# Altium PCB MoveH Messkette einseitig.PcbDoc
Units mm, origin at the board's own origin, x right, y up, seen from the top; angles counter-clockwise.
Board outline 66 x 63 mm, 2 copper layers (Top Layer, Bottom Layer); 59 components, 46 nets, 263 pads, 90 vias.
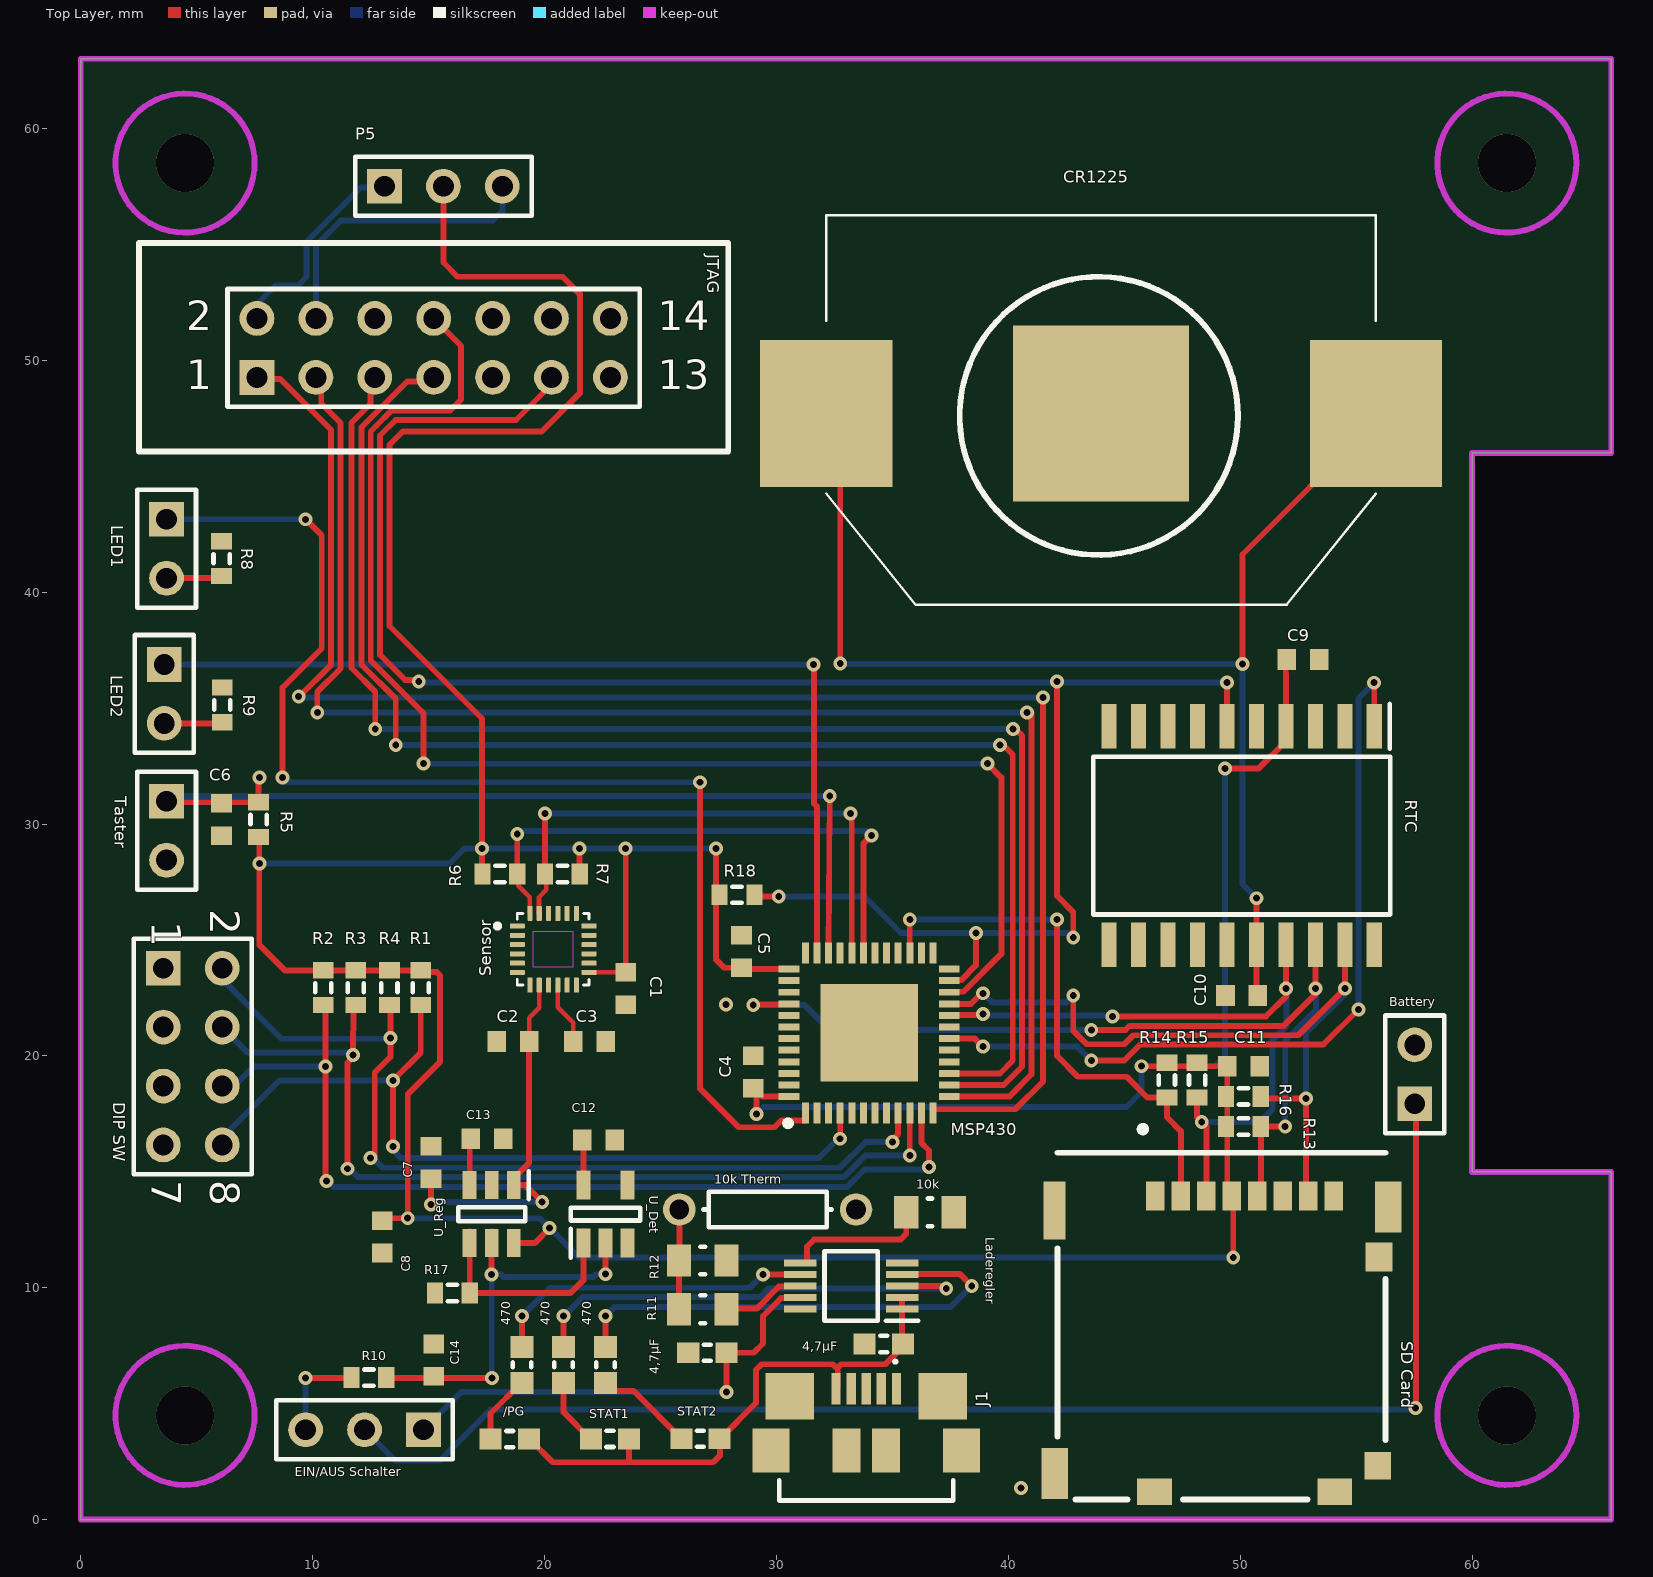
[diagram p0: Top Layer view]
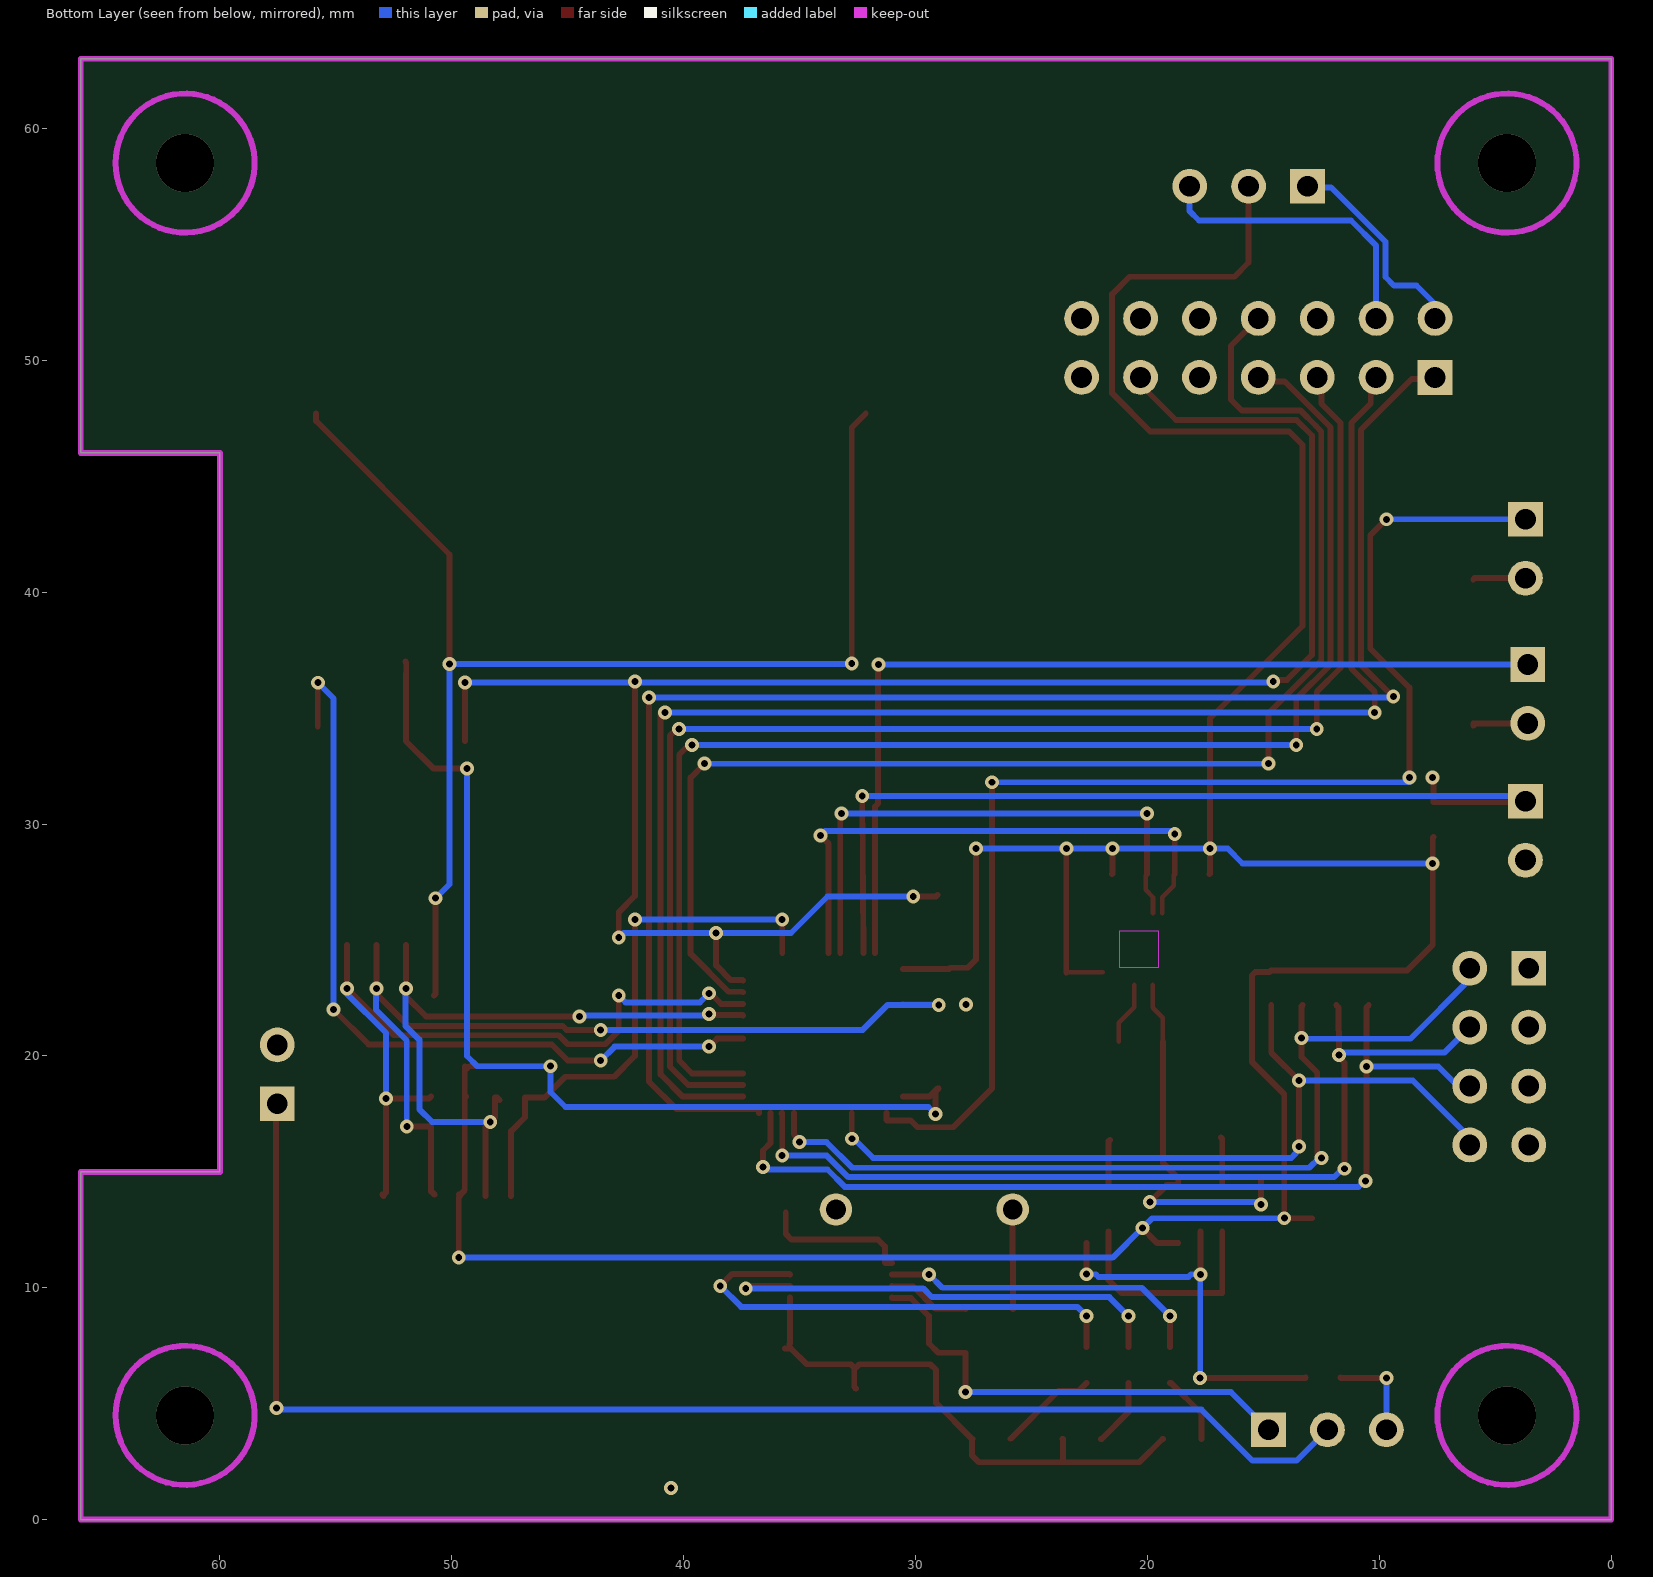
[diagram p1: Bottom Layer view, seen from below]

## Layer stack, top to bottom
Top Solder: solder mask 0.0102, Solder Resist, Dk 3.5
Top Layer: signal copper 0.0356
Dielectric 1: dielectric 0.32, FR-4, Dk 4.8
Bottom Layer: signal copper 0.0356
Bottom Solder: solder mask 0.0102, Solder Resist, Dk 3.5

## Board outline
60,15 66,15 66,0 0,0 0,63 66,63 66,46 60,46

## Design rules (kind name [scope] priority, off if disabled: settings)
Clearance [All] p1: gap=0.15 ignorepadtopadclearanceinfootprint=TRUE
PolygonConnect [All] p1: connectstyle=Relief reliefconductorwidth=0.254 reliefentries=4 polygonreliefangle="90 Angle" airgapwidth=0.254
RoutingVias [All] p1: holewidth=0.3 width=0.6 viastyle="Through Hole" minholewidth=0.3 minwidth=0.6 maxholewidth=0.3 maxwidth=0.6
SilkToSilkClearance [All] p1: silktosilkclearance=0.1
SolderMaskExpansion [All] p1: expansion=0.102
Width [All] p1: maxlimit=0.254 minlimit=0.2 preferedwidth=0.254
29 further rules are at their usual default settings.

## Classes and differential pairs
component class "POWER MANAGEMENT": 4,7µF 10k "10k Therm" 470 /PG Battery C7 C8 C12 C13 C14 "EIN/AUS Schalter" J1 Laderegler R10 R11 R12 R17 STAT1 STAT2 U_Det U_Reg

## Components (designator, comment, footprint, x,y, rotation, side; value= is the part's Value field where it differs from the comment)
4,7µF "VJ0603" VJ0603 27.023,7.197 r180 top
4,7µF "VJ0603" VJ0603 34.623,7.577 r180 top
10k "RES 0805" D12CRCW0805 36.623,13.252 r180 top
"10k Therm" "10k Therm" AXIAL-0.3 29.623,13.377 r180 top value=1K
470 "RES 0603" "Vishay D11/CRCW0603 Resistor" 19.023,6.677 r90 top
470 "RES 0603" "Vishay D11/CRCW0603 Resistor" 22.623,6.677 r90 top
470 "RES 0603" "Vishay D11/CRCW0603 Resistor" 20.823,6.677 r90 top
/PG "LED SMD 0603" "SMD LED 0603" 18.498,3.477 r180 top
Battery "Header 2H" HDR1X2 57.525,17.935 r90 top
C1 "Cap" 1608[0603] 23.5,22.9 r90 top value=100nF
C2 "Cap" 1608[0603] 18.639,20.62 r180 top value=100nF
C3 "Cap" 1608[0603] 21.939,20.62 r0 top value=100nF
C4 "Cap" 1608[0603] 29,19.3 r270 top value=100nF
C5 "Cap" 1608[0603] 28.5,24.5 r270 top value=100nF
C6 "Cap" 1608[0603] 6.073,30.19 r90 top value=40nF
C7 "Cap" 1608[0603] 15.1,15.4 r270 top value=2.2µF
C8 "Cap" 1608[0603] 13,12.2 r90 top value=2.2µF
C9 "Cap" 1608[0603] 52.7,37.1 r180 top value=100nF
C10 "Cap" 1608[0603] 50.065,22.6 r180 top value=100nF
C11 "Cap" 1608[0603] 50.14,19.555 r180 top value=100nF
C12 "Cap" 1608[0603] 22.323,16.377 r180 top value=4,7µF
C13 "Cap" 1608[0603] 17.523,16.427 r180 top value=10nF
C14 "Cap" 1608[0603] 15.223,6.877 r270 top value=2.2µF
CR1225 "12BH022-GR" 12BH022GR 44,47.7 r0 top
"DIP SW" "Header 4X2" HDR2X4 3.56,23.78 r270 top
"EIN/AUS Schalter" "EIN/AUS Schalter" HDR1X3 14.778,3.877 r180 top
J1 "ZX62R-B-5P_30_" ZX62R-B-5P(30) 33.873,0.827 r0 top
JTAG "Header 7X2" HDR2X7 7.6,49.26 r0 top
Laderegler "MCP73833-AMI_UN" SOP50P490X110-10N 33.223,10.077 r180 top
LED1 "Header 2" HDR1X2 3.7,43.14 r270 top
LED2 "Header 2" HDR1X2 3.6,36.88 r270 top
MSP430 "MSP430FR5969IRGZR" QFN50P700X700X100-49N-D 34,20.995 r90 top
P5 "Header 3" HDR1X3 13.1,57.5 r0 top
R1 "Res3" J1-0603 14.66,22.94 r270 top value=5K
R2 "Res3" J1-0603 10.46,22.94 r270 top value=5K
R3 "Res3" J1-0603 11.86,22.94 r270 top value=5K
R4 "Res3" J1-0603 13.31,22.94 r270 top value=5K
R5 "Res3" J1-0603 7.673,30.19 r270 top value=100K
R6 "Res3" J1-0603 18.073,27.845 r0 top value=10K
R7 "Res3" J1-0603 20.773,27.845 r180 top value=10K
R8 "Res3" J1-0603 6.073,41.44 r90 top value=330
R9 "Res3" J1-0603 6.1,35.14 r90 top value=330
R10 "10" J1-0603 12.423,6.127 r180 top
R11 "RES 0805" D12CRCW0805 26.823,9.077 r0 top
R12 "RES 0805" D12CRCW0805 26.823,11.177 r180 top
R13 "Res3" J1-0603 50.14,16.955 r180 top value=10K
R14 "Res3" J1-0603 46.84,18.955 r90 top value=10K
R15 "Res3" J1-0603 48.14,18.955 r270 top value=10K
R16 "Res3" J1-0603 50.14,18.255 r0 top value=10K
R17 "Res3" J1-0603 16.023,9.777 r0 top value=100K
R18 "Res3" J1-0603 28.3,26.95 r180 top value=10k
RTC "DS3234S#" SOIC127P1032X265-20N 50.065,29.5 r270 top
"SD Card" "503182-1852" 5031821852 49.19,13.325 r0 top
Sensor "ICM-20948" QFN40P300X300X105-24N 20.373,24.6 r0 top
STAT1 "LED SMD 0603" "SMD LED 0603" 22.823,3.483 r180 top
STAT2 "LED SMD 0603" "SMD LED 0603" 26.723,3.49 r180 top
Taster "Header 2" HDR1X2 3.7,30.98 r270 top
U_Det "NCP302LSN20T1G" SOT95P275X110-5N 22.623,13.177 r90 top
U_Reg "MAX8882EUTA5+T" SOT95P280X145-6N 17.723,13.177 r270 top

## Footprints (in the part's own frame and the unit in brackets; to place one, negate y for a bottom-side part, rotate by r counter-clockwise, add the part's x,y. Pads: shape width x height; smd on the part's side, far side on the other; paste and mask are expansions set on the pad)
12BH022GR [mm]
  rect 5.7x6.35 smd: 1(-11.85,0) 2(11.85,0)
  rect 7.6x7.6 smd: 3(0,0)
  silkscreen extent -11.85,-8.25 11.85,8.55, body extent -14.13,-8.25 14.13,8.55, height 4.1
1608[0603] [mm] "Chip Capacitor, Body 1.6x0.8mm, IPC High Density"
  rect 0.8x0.9 smd: 1(-0.7,0) 2(0.7,0)
  body extent -0.87,-0.48 0.87,0.48, height 1.3
5031821852 [mm]
  rect 0.8x1.24 smd: 1(-2.85,0.63) 2(-1.75,0.63) 3(-0.65,0.63) 4(0.45,0.63) 5(1.55,0.63) 6(2.65,0.63) 7(3.75,0.63) 8(4.85,0.63)
  rect 0.95x2.5 smd: 9(-7.195,0)
  rect 1.15x2.2 smd: 10(7.195,0.15) 15(-7.195,-11.33)
  rect 1.16x1.25 smd: 11(6.795,-2)
  rect 1.16x1.2 smd: 12(6.74,-11)
  rect 1.5x1.15 smd: 13(4.89,-12.125) 14(-2.89,-12.125)
  silkscreen extent -7.07,-12.45 7.07,3.66, body extent -7.47,-12.5 7.47,2.45, height 1.48
AXIAL-0.3 [mm] "Axial Device, Thru-Hole; 2 Leads; 0.3 in Pin Spacing"
  round 1.4 hole 0.85: 1(-3.81,0) 2(3.81,0)
  silkscreen extent -2.77,-0.76 2.77,0.76
D12CRCW0805 [mm] "Chip Resistor, 2-Leads, Body 2,1x1,3mm, IPC Medium Density"
  rect 1.05x1.4 smd: 1(-1.025,0) 2(1.025,0)
  silkscreen extent -0.1,-0.6 0.1,0.6, body extent -1.1,-0.71 1.1,0.71, height 0.51
HDR1X2 [mm] "Connector; Header; 2 Position"
  rect 1.5x1.5 hole 0.9: 1(0,0)
  round 1.5 hole 0.9: 2(2.54,0)
  silkscreen extent -1.27,-1.27 3.81,1.27
HDR1X3 [mm] "Connector; Header; 3 Position"
  rect 1.5x1.5 hole 0.9: 1(0,0)
  round 1.5 hole 0.9: 2(2.54,0) 3(5.08,0)
  silkscreen extent -1.27,-1.27 6.35,1.27
HDR2X4 [mm] "Connector; Header; 4x2 Position"
  rect 1.5x1.5 hole 0.9: 1(0,0)
  round 1.5 hole 0.9: 2(0,2.54) 3(2.54,0) 4(2.54,2.54) 5(5.08,0) 6(5.08,2.54) 7(7.62,0) 8(7.62,2.54)
  silkscreen extent -1.27,-1.27 8.89,3.81
HDR2X7 [mm] "Connector; Header; 7x2 Position"
  rect 1.5x1.5 hole 0.9: 1(0,0)
  round 1.5 hole 0.9: 2(0,2.54) 3(2.54,0) 4(2.54,2.54) 5(5.08,0) 6(5.08,2.54) 7(7.62,0) 8(7.62,2.54) 9(10.16,0) 10(10.16,2.54) 11(12.7,0) 12(12.7,2.54) 13(15.24,0) 14(15.24,2.54)
  silkscreen extent -1.27,-1.27 16.51,3.81
J1-0603 [mm] "Chip Resistor, Body 1.6x0.8mm, IPC High Density"
  rect 0.7x0.9 smd: 1(-0.75,0) 2(0.75,0)
  silkscreen extent -0.2,-0.35 0.2,0.35, body extent -0.85,-0.48 0.85,0.48, height 0.9
QFN40P300X300X105-24N [mm]
  rrect25% 0.64x0.22 smd: 1(-1.545,1) 2(-1.545,0.6) 3(-1.545,0.2) 4(-1.545,-0.2) 5(-1.545,-0.6) 6(-1.545,-1) 13(1.545,-1) 14(1.545,-0.6) 15(1.545,-0.2) 16(1.545,0.2) 17(1.545,0.6) 18(1.545,1)
  rrect25% 0.22x0.64 smd: 7(-1,-1.545) 8(-0.6,-1.545) 9(-0.2,-1.545) 10(0.2,-1.545) 11(0.6,-1.545) 12(1,-1.545) 19(1,1.545) 20(0.6,1.545) 21(0.2,1.545) 22(-0.2,1.545) 23(-0.6,1.545) 24(-1,1.545)
  Keep-Out Layer region: 0.85,-0.77 -0.85,-0.77 -0.85,0.77 0.85,0.77
  Keep-Out Layer region: 0.85,-0.77 -0.85,-0.77 -0.85,0.77 0.85,0.77
  silkscreen extent -2.5,-1.55 1.55,1.55
QFN50P700X700X100-49N-D [mm]
  rect 0.9x0.3 smd: 1(-3.45,2.75) 2(-3.45,2.25) 3(-3.45,1.75) 4(-3.45,1.25) 5(-3.45,0.75) 6(-3.45,0.25) 7(-3.45,-0.25) 8(-3.45,-0.75) 9(-3.45,-1.25) 10(-3.45,-1.75) 11(-3.45,-2.25) 12(-3.45,-2.75) 25(3.45,-2.75) 26(3.45,-2.25) 27(3.45,-1.75) 28(3.45,-1.25) 29(3.45,-0.75) 30(3.45,-0.25) 31(3.45,0.25) 32(3.45,0.75) 33(3.45,1.25) 34(3.45,1.75) 35(3.45,2.25) 36(3.45,2.75)
  rect 0.3x0.9 smd: 13(-2.75,-3.45) 14(-2.25,-3.45) 15(-1.75,-3.45) 16(-1.25,-3.45) 17(-0.75,-3.45) 18(-0.25,-3.45) 19(0.25,-3.45) 20(0.75,-3.45) 21(1.25,-3.45) 22(1.75,-3.45) 23(2.25,-3.45) 24(2.75,-3.45) 37(2.75,3.45) 38(2.25,3.45) 39(1.75,3.45) 40(1.25,3.45) 41(0.75,3.45) 42(0.25,3.45) 43(-0.25,3.45) 44(-0.75,3.45) 45(-1.25,3.45) 46(-1.75,3.45) 47(-2.25,3.45) 48(-2.75,3.45)
  rect 4.2x4.2 smd: 49(0,0)
  silkscreen extent -4.02,3.37 -3.78,3.62, body extent -3.55,-3.55 3.55,3.55, height 1
"SMD LED 0603" [mm] "Chip-Capacitor, 0603, found on Farnell"
  rect 0.95x0.9 smd: 1(-0.825,0) 2(0.825,0)
  silkscreen extent -0.15,-0.35 0.15,0.35, body extent -1.11,-0.43 1.11,0.42, height 1
SOIC127P1032X265-20N [mm]
  rect 1.925x0.65 smd: 1(-4.712,5.715) 2(-4.712,4.445) 3(-4.712,3.175) 4(-4.712,1.905) 5(-4.712,0.635) 6(-4.712,-0.635) 7(-4.712,-1.905) 8(-4.712,-3.175) 9(-4.712,-4.445) 10(-4.712,-5.715) 11(4.712,-5.715) 12(4.712,-4.445) 13(4.712,-3.175) 14(4.712,-1.905) 15(4.712,-0.635) 16(4.712,0.635) 17(4.712,1.905) 18(4.712,3.175) 19(4.712,4.445) 20(4.712,5.715)
  silkscreen extent -5.68,-6.4 3.4,6.4, body extent -5.16,-6.4 5.16,6.4, height 2.65
SOP50P490X110-10N [mm]
  rect 1.4x0.3 smd: 1(-2.2,1) 2(-2.2,0.5) 3(-2.2,0) 4(-2.2,-0.5) 5(-2.2,-1) 6(2.2,-1) 7(2.2,-0.5) 8(2.2,0) 9(2.2,0.5) 10(2.2,1)
  silkscreen extent -2.9,-1.5 1.15,1.5, body extent -2.45,-1.5 2.45,1.5, height 1.1
SOT95P275X110-5N [mm]
  rect 1.25x0.6 smd: 1(-1.25,0.95) 2(-1.25,0) 3(-1.25,-0.95) 4(1.25,-0.95) 5(1.25,0.95)
  silkscreen extent -1.88,-1.5 0.28,1.5, body extent -1.38,-1.5 1.38,1.5, height 1.1
SOT95P280X145-6N [mm]
  rect 1.2x0.6 smd: 1(-1.25,0.95) 2(-1.25,0) 3(-1.25,-0.95) 4(1.25,-0.95) 5(1.25,0) 6(1.25,0.95)
  silkscreen extent -1.85,-1.45 0.3,1.6, body extent -1.4,-1.45 1.4,1.45, height 1.45
"Vishay D11/CRCW0603 Resistor" [mm] "Chip Resistor, 2-Leads, Body 1,6x0,8mm, IPC Medium Density"
  rect 0.95x1 smd: 1(-0.775,0) 2(0.775,0)
  silkscreen extent -0.1,-0.4 0.1,0.4, body extent -0.82,-0.51 0.82,0.44, height 0.55
VJ0603 [mm] "Ceramic Chip Capacitor Vishay Vitramon"
  rect 0.95x0.9 smd: 1(-0.825,0) 2(0.825,0)
  silkscreen extent -0.15,-0.35 0.15,0.35, body extent -0.74,-0.39 0.74,0.41, height 0.94
ZX62R-B-5P(30) [mm]
  rect 0.4x1.35 smd: 1(1.3,4.825) 2(0.65,4.825) 3(0,4.825) 4(-0.65,4.825) 5(-1.3,4.825)
  rect 2.1x2 smd: 6(-3.3,4.5) 7(3.3,4.5)
  rect 1.6x1.9 smd: 8(-4.1,2.15) 9(4.1,2.15)
  rect 1.2x1.9 smd: 10(-0.85,2.15) 11(0.85,2.15)
  silkscreen extent -3.75,0 3.75,6.02, body extent -3.1,-0.23 5.7,2.71, height 5.6

## Part data
4,7µF 4,7µF: "Ceramic Chip Capacitor Vishay Vitramon", Supplier Part Number 1=1650946, Supplier 1=Farnell
10k R11 R12: "Chip Resistor 0805", Supplier Part Number 1=1738935, Fitted=False, Supplier 1=Farnell
"10k Therm": library part Res1, "Resistor", LatestRevisionDate=17-Jul-2002, LatestRevisionNote="Re-released for DXP Platform.", PackageDescription="Axial Device, Thru-Hole; 2 Leads; 0.3 in Pin Spacing", PackageReference=AXIAL-0.3, Published=8-Jun-2000, Publisher="Altium Limited"
470 470 470: "Chip Resistor 0603", Supplier Part Number 1=1738901RL, Fitted=False, Supplier 1=Farnell
Battery: "Header, 2-Pin, Right Angle", LatestRevisionDate=17-Jul-2002, LatestRevisionNote="Re-released for DXP Platform.", Publisher="Altium Limited"
C1 C2 C3 C4 C5 C6 C7 C8 C9 C10 C11 C12 C13 C14: "Capacitor", LatestRevisionDate=17-Jul-2002, LatestRevisionNote="Re-released for DXP Platform.", PackageDescription="Radial Cap, Thru-Hole; 2 Leads; 0.3 in Pin Spacing", PackageReference=RAD-0.3, Published=8-Jun-2000, Publisher="Altium Limited"
CR1225: "Hardware", Manufacturer_Name="Eagle Plastic Devices", Datasheet Link=https://componentsearchengine.com//12BH022-GR.pdf, Height=4mm, Manufacturer_Part_Number=12BH022-GR, Mouser2 Part Number=12BH022-GR, Mouser2 Price/Stock=https://www.mouser.com/Search/Refine.aspx?Keyword=12BH022-GR
"DIP SW": "Header, 4-Pin, Dual row", LatestRevisionDate=17-Jul-2002, LatestRevisionNote="Re-released for DXP Platform.", Publisher="Altium Limited"
"EIN/AUS Schalter": library part "Header 3H", "Header, 3-Pin, Right Angle", LatestRevisionDate=17-Jul-2002, LatestRevisionNote="Re-released for DXP Platform.", Publisher="Altium Limited"
J1: "Connector", Manufacturer_Name=Hirose, Manufacturer_Part_Number=ZX62R-B-5P(30)
JTAG: "Header, 7-Pin, Dual row", LatestRevisionDate=17-Jul-2002, LatestRevisionNote="Re-released for DXP Platform.", Publisher="Altium Limited"
Laderegler: "Integrated Circuit", Manufacturer_Name=Microchip, Manufacturer_Part_Number=MCP73833-AMI/UN, Mouser2 Part Number=579-MCP73833-AMI/UN, Datasheet Link=https://componentsearchengine.com//MCP73833-AMI_UN.pdf, Height=1.1mm, Mouser2 Price/Stock=https://www.mouser.com/Search/Refine.aspx?Keyword=579-MCP73833-AMI%2FUN
LED1 LED2 Taster: "Header, 2-Pin", LatestRevisionDate=17-Jul-2002, LatestRevisionNote="Re-released for DXP Platform.", Publisher="Altium Limited"
MSP430: "Integrated Circuit", Manufacturer_Name="Texas Instruments", Datasheet Link=http://www.ti.com/lit/gpn/msp430fr5969, Height=1mm, Manufacturer_Part_Number=MSP430FR5969IRGZR
P5: "Header, 3-Pin", LatestRevisionDate=17-Jul-2002, LatestRevisionNote="Re-released for DXP Platform.", Publisher="Altium Limited"
R1 R2 R3 R4 R5 R6 R7 R8 R9 R13 R14 R15 R16 R17 R18: "Resistor", LatestRevisionDate=29-May-2009, LatestRevisionNote="IPC-7351 Footprint Added.", PackageDescription="Chip Resistor", PackageReference=J1-0603, Published=8-Jun-2000, Publisher="Altium Limited"
R10: library part Res3, "Resistor", LatestRevisionDate=29-May-2009, LatestRevisionNote="IPC-7351 Footprint Added.", PackageDescription="Chip Resistor", PackageReference=J1-0603, Published=8-Jun-2000, Publisher="Altium Limited"
RTC: "Integrated Circuit", Manufacturer_Name="Maxim Integrated", Mouser2 Part Number=700-DS3234S#, Datasheet Link=https://componentsearchengine.com//DS3234S#.pdf, Height=2.65mm, Manufacturer_Part_Number=DS3234S#, Mouser2 Price/Stock=https://www.mouser.com/Search/Refine.aspx?Keyword=700-DS3234S%23
"SD Card": "Connector", Manufacturer_Name=Molex, Mouser2 Part Number=538-503182-1852, Datasheet Link=https://componentsearchengine.com//503182-1852.pdf, Manufacturer_Part_Number=503182-1852, Mouser2 Price/Stock=https://www.mouser.com/Search/Refine.aspx?Keyword=538-503182-1852
Sensor: "Accelerometer, Gyroscope, Magnetometer, 9 Axis Sensor I²C, SPI Output", Package="TFQFN-24 TDK InvenSense", Availability=Unavailable, MF="TDK InvenSense", MP=ICM-20948, Price=None, SnapEDA_Link=https://www.snapeda.com/parts/ICM-20948/TDK%20InvenSense/view-part/4218863/?ref=snap
U_Det: "Integrated Circuit", Manufacturer_Name="ON Semiconductor", Datasheet Link=http://www.onsemi.com/pub/Collateral/NCP302-D.PDF, Height=1.1mm, Manufacturer_Part_Number=NCP302LSN20T1G
U_Reg: "Integrated Circuit", Manufacturer_Name="Maxim Integrated", Datasheet Link=https://pdfserv.maximintegrated.com/en/ds/MAX8882-MAX8883.pdf, Height=1.45mm, Manufacturer_Part_Number=MAX8882EUTA5+T

## Via types
v1: diameter 0.6, hole 0.3, Top Layer to Bottom Layer, 86 vias
v2: diameter 2.5, hole 2.5, Top Layer to Bottom Layer, 4 vias

## Nets (pads, with @x,y where several pads share a name; then routed paths per layer and width w, separated by ;. In a path a pad name is that pad's centre, name@x,y a point inside that pad or via, vN(x,y) a via of type N, cw(c..) or ccw(c..) an arc to the next point about the centre after c; other vN are vias at no path point)
1,8V: C2.1 C7.2 Sensor.8 U_Reg.1 | length 16.6
  Top Layer w0.2: C2.1 19.348,20.629 19.348,21.648 19.773,22.073 Sensor.8
  Top Layer w0.254: v1(15.1,13.6) C7.2 ; C2.1 19.323,20.604 19.323,15.377 18.673,14.727 U_Reg.1 19.173,14.427 v1(19.9,13.7)
  Bottom Layer w0.254: v1(15.1,13.6) 15.2,13.7 v1(19.9,13.7)
3,3V: "SD Card.4" C1.2 C4.2 C5.2 C8.2 C9.2 C11.2 MSP430.37 MSP430.48 P5.2 R1.1 R2.1 R3.1 R4.1 R5.2 R6.1 R7.1 R13.2 R14.2 R15.1 R16.1 R18.2 RTC.4 Sensor.13 U_Reg.6 | length 198.7
  Top Layer w0.2: Sensor.13@21.931,23.613 C1.2@23.5,23.613
  Top Layer w0.254: R5.2 7.7,29.413 v1(7.7,28.3) 7.7,24.788 8.798,23.69 R2.1 R3.1 R4.1 R1.1 14.737,23.613 15.351,23.613 15.5,23.464 15.5,19.745 14.1,18.345 v1(14.1,13) C8.2@12.9,13 ; P5.2 15.64,54.21 16.25,53.6 20.775,53.6 21.525,52.85 21.525,48.575 19.879,46.929 13.891,46.929 13.312,46.35 13.312,38.538 17.3,34.55 v1(17.3,28.945) 17.312,28.933 17.312,27.857 R6.1 ; U_Reg.6 19.573,11.927 v1(20.223,12.577) ; v1(21.5,28.945) 21.511,28.934 21.511,27.856 R7.1 ; C1.2 23.5,23.613 23.5,26.025 v1(23.5,28.94) ; v1(27.4,28.94) 27.4,24.145 27.745,23.8 C5.2 28.555,23.745 MSP430.37 ; v1(29.146,17.5) 29.146,18.454 C4.2 29.05,18.6 29.405,18.245 MSP430.48 ; v1(45.74,19.555) 49.24,19.555 49.34,19.455 C11.2 49.44,14.21 49.64,14.01 ; v1@49.3,32.4 v1(49.34,32.4) 50.796,32.4 51.97,33.574 RTC.4 51.97,36.495 51.965,36.5 51.965,36.965 C9.2@52,37 ; v1(49.7,11.3) 49.7,13.895 49.64,13.955 49.7,14.015
  Bottom Layer w0.254: v1(7.7,28.3) 15.9,28.3 16.54,28.94 v1@17.3,28.94 ; v1(14.1,13) 19.8,13 v1(20.223,12.577) 21.5,11.3 v1(49.7,11.3) ; v1(17.3,28.945) v1(21.5,28.945) 27.395,28.945 v1(27.4,28.94) ; v1(29.146,17.5) 29.446,17.8 45.095,17.8 45.74,18.445 v1(45.74,19.555) 48.9,19.555 49.34,19.995 v1(49.34,32.4)
/PG: 470.2@19.023,7.452 Laderegler.7 | length 14.1
  Top Layer w0.254: 470.2@19.023,7.452 v1(19.023,8.777) ; v1(29.423,10.577) Laderegler.7
  Bottom Layer w0.254: v1(19.023,8.777) 20.246,10 28.846,10 v1(29.423,10.577)
"Battery Output": C14.2 R10.1 U_Det.2 U_Reg.5 | length 17.2
  Top Layer w0.254: R10.1 13.198,6.102 16.393,6.102 ; 16.401,6.102 v1(17.731,6.102) ; v1(17.719,10.581) 17.719,12.423 U_Reg.5@17.723,12.427 ; v1(22.623,10.585) U_Det.2
  Bottom Layer w0.254: v1(17.719,10.581) v1@17.727,10.585 ; v1@17.723,6.102 17.723,10.577 17.724,10.579 v1@17.727,10.585 ; v1(22.623,10.585) 22.231,10.585 22.111,10.465 18.236,10.465 18.115,10.585 v1@17.727,10.585
GND: 4,7µF.2 10k.1 "10k Therm.1" "DIP SW.1" "DIP SW.3" "DIP SW.5" "DIP SW.7" "SD Card.6" Battery.2 C1.1 C2.2 C3.2 C4.1 C5.1 C6.1 C7.1 C8.1 C9.1 C10.2 C11.1 C12.1 C13.1 C14.1 CR1225.3 J1.1 JTAG.9 Laderegler.5 MSP430.36 MSP430.41 MSP430.44 MSP430.47 R8.2 R9.2 R12.1 R17.1 RTC.7 RTC.8 RTC.9 RTC.10 RTC.11 RTC.12 RTC.13 RTC.14 RTC.15 Sensor.18 Sensor.19 Sensor.20 Taster.2 U_Det.3 U_Reg.2
  other v1: 27.825,22.218
Ladespannung: 4,7µF.1@35.448,7.577 /PG.1 J1.5 Laderegler.1 Laderegler.2 STAT1.1 STAT2.1 | length 24.2
  Top Layer w0.254: /PG.1 19.348,3.477 20.348,2.477 23.623,2.477 ; STAT1.1@23.673,3.483 STAT1.1 23.648,2.502 23.623,2.477 ; J1.5 32.646,5.725 32.646,6.553 ; Laderegler.2 35.423,9.1 35.446,9.077 Laderegler.1 35.423,7.602 35.448,7.577 ; 35.623,7.377 35.373,7.377 34.698,6.702 32.795,6.702 32.646,6.553 ; 23.623,2.477 27.273,2.477 27.573,2.777 27.573,3.465 STAT2.1 27.573,3.49 29.123,5.04 29.123,6.462 29.363,6.702 32.423,6.702 32.572,6.553 32.646,6.553
"LED1 Anode": LED1.1 MSP430.1 | length 55.1
  Top Layer w0.254: v1(8.7,32) 8.7,35.88 10.392,37.572 10.392,42.446 9.7,43.138 v1(9.7,43.14) ; v1(26.7,31.8) 26.7,18.6 28.377,16.923 29.918,16.923 30.216,17.222 31.227,17.222 31.25,17.245 MSP430.1
  Bottom Layer w0.254: LED1.1@3.76,43.2 LED1.1 v1(9.7,43.14) ; v1@8.7,31.8 8.8,31.8 v1(26.7,31.8)
"LED2 Anode": LED2.1 MSP430.35 | length 40.5
  Top Layer w0.254: v1@31.623,36.88 31.623,30.877 31.75,30.75 MSP430.35
  Bottom Layer w0.254: LED2.1 v1(31.6,36.88)
Net4,7µF_1: 4,7µF.1@27.848,7.197 "EIN/AUS Schalter.1" Laderegler.9 | length 20.3
  Top Layer w0.254: v1(27.848,5.5) 27.848,7.197 29.023,7.197 29.423,7.597 29.423,8.777 30.2,9.554 31,9.554 Laderegler.9
  Bottom Layer w0.254: 14.778,3.877 16.401,5.5 v1(27.848,5.5)
"Net10k Therm_2": "10k Therm.2" R11.1 R12.2 | length 4.3
  Top Layer w0.254: R11.1 R12.2 25.813,11.192 25.813,13.377
Net10k_2: 10k.2 Laderegler.6 | length 6.4
  Top Layer w0.254: Laderegler.6 31.3,11.077 31.323,11.1 31.323,11.777 31.623,12.077 35.35,12.077 35.598,12.325 10k.2
Net470_1: 470.1@20.823,5.902 STAT1.2 | length 2.9
  Top Layer w0.254: 470.1@20.823,5.902 20.823,4.633 21.973,3.483 STAT1.2
Net470_1: 470.1@22.623,5.902 STAT2.2 | length 4.3
  Top Layer w0.254: 470.1@22.623,5.902 22.971,5.554 23.834,5.554 STAT2.2
Net/PG_2: 470.1@19.023,5.902 /PG.2 | length 3
  Top Layer w0.254: /PG.2 17.673,4.577 18.998,5.902 470.1@19.023,5.902
NetBattery_1: "EIN/AUS Schalter.2" Battery.1 | length 59.9
  Top Layer w0.254: Battery.1 57.575,17.885 v1@57.575,4.825
  Bottom Layer w0.254: 12.238,3.877 13.565,2.55 15.475,2.55 17.675,4.75 v1@57.55,4.75
  other v1: 57.55,4.825
NetC3_1: C3.1 Sensor.10 | length 2.7
  Top Layer w0.2: Sensor.10 20.573,22.09 21.239,21.424 C3.1
NetC10_1: C10.1 CR1225.1 CR1225.2 RTC.16 | length 56.1
  Top Layer w0.254: CR1225.1 32.753,47.097 v1(32.753,36.92) ; v1(50.1,36.9) 50.1,41.625 55.85,47.375 CR1225.2 ; v1(50.7,26.8) RTC.16 50.7,22.665 C10.1
  Bottom Layer w0.254: v1@32.797,36.965 32.862,36.9 v1(50.1,36.9) 50.1,27.4 v1(50.7,26.8)
NetC12_2: C12.2 U_Det.5 | length 2
  Top Layer w0.254: C12.2 21.673,16.327 U_Det.5
NetC13_2: C13.2 U_Reg.3 | length 2.1
  Top Layer w0.254: U_Reg.3 16.773,16.427 C13.2@16.823,16.477
"NetDIP SW_2": "DIP SW.2" MSP430.9 R4.2 | length 40
  Top Layer w0.254: v1@12.68,15.7 12.68,19.28 13.36,19.96 v1(13.36,20.765) 13.36,22.14 R4.2 ; v1(35,16.282) 35,16.376 35.25,16.626 MSP430.9
  Bottom Layer w0.254: 6.1,23.78 6.1,23.3 8.66,20.74 v1@13.31,20.74 ; v1(12.5,15.6) 12.594,15.6 13.018,15.175 13.2,15.175 32.733,15.175 33.839,16.282 v1(35,16.282)
"NetDIP SW_4": "DIP SW.4" MSP430.10 R3.2 | length 40
  Top Layer w0.254: v1(11.5,15.134) 11.5,19.706 11.74,19.946 v1(11.74,20.04) 11.76,22.09 R3.2 ; v1(35.75,15.7) MSP430.10 MSP430.10@35.773,17.522
  Bottom Layer w0.254: 6.1,21.24 7.2,20.14 v1@11.76,20.14 ; v1(11.5,15.134) 11.594,15.134 11.956,14.771 12.155,14.771 32.9,14.771 33.829,15.7 v1(35.75,15.7)
"NetDIP SW_6": "DIP SW.6" MSP430.11 R2.2 | length 41
  Top Layer w0.254: R2.2 10.56,22.09 10.56,19.552 v1@10.548,19.54 ; v1(10.56,19.54) 10.56,14.74 v1@10.6,14.7 ; MSP430.11 36.25,16.25 36.58,15.92 v1(36.58,15.207)
  Bottom Layer w0.254: 6.1,18.7 6.62,18.7 7.46,19.54 v1@10.548,19.54 ; v1@10.774,14.48 10.9,14.354 11.5,14.354 33.054,14.354 33.8,15.1 36.473,15.1 v1(36.58,15.207)
  other v1: 10.6,14.6
"NetDIP SW_8": "DIP SW.8" MSP430.4 R1.2 | length 36.3
  Top Layer w0.254: v1@13.63,16.164 13.46,16.334 v1(13.46,18.94) 14.66,20.14 R1.2 ; v1@32.75,16.477 MSP430.4
  Bottom Layer w0.254: 6.1,16.16 6.1,16.48 8.56,18.94 v1(13.46,18.94) ; v1@13.583,16.117 13.583,15.817 13.8,15.6 31.829,15.6 32.656,16.427 v1(32.75,16.427)
  other v1: 13.46,16.1
"NetEIN/AUS Schalter_3": "EIN/AUS Schalter.3" R10.2 | length 4.2
  Top Layer w0.254: v1(9.698,6.102) 11.648,6.102 R10.2
  Bottom Layer w0.254: 9.698,3.877 v1(9.698,6.102)
NetJTAG_11: JTAG.11 MSP430.23 R18.1 RTC.6 | length 86.3
  Top Layer w0.254: v1(14.575,36.15) 14.509,36.216 13.984,36.216 12.908,37.292 12.908,46.75 13.579,47.421 18.771,47.421 20.3,48.95 JTAG.11 ; R18.1 29.125,26.875 v1(30.1,26.875) ; MSP430.23 37.473,23.268 37.965,23.268 38.6,23.903 v1(38.6,25.3) ; v1(42.1,36.15) 42.1,26.9 42.8,26.2 v1(42.8,25.1) ; RTC.6@49.43,33.574 RTC.6 v1(49.43,36.1)
  Bottom Layer w0.254: v1@14.575,36.1 42.1,36.1 v1(49.43,36.1) ; v1(30.1,26.875) 33.8,26.875 35.375,25.3 v1(38.6,25.3) 42.6,25.3 v1(42.8,25.1)
NetLaderegler_8: Laderegler.8 R11.2 | length 3.6
  Top Layer w0.254: R11.2 27.871,9.1 29.146,9.1 30.1,10.054 31,10.054 Laderegler.8
NetLED1_2: LED1.2 R8.1 | length 2.3
  Top Layer w0.254: LED1.2 5.89,40.6 R8.1@5.95,40.54
NetLED2_2: LED2.2 R9.1 | length 2.5
  Top Layer w0.254: LED2.2 R9.1@5.95,34.34 ; R9.1@5.85,34.34 R9.1@5.95,34.24
NetMSP430_18: MSP430.18 RTC.1 | length 35.2
  Top Layer w0.254: MSP430.18 38.555,20.745 v1(38.9,20.4) ; v1(43.577,19.8) 45,19.8 45.688,20.488 53.587,20.488 v1(55.1,22.001) ; v1@55.765,36.1 v1(55.772,36.092) 55.78,36.085 RTC.1
  Bottom Layer w0.254: v1(38.9,20.4) 42.977,20.4 v1(43.577,19.8) ; v1(55.1,22.001) 55.1,35.42 v1(55.772,36.092)
NetMSP430_20: "SD Card.3" MSP430.20 R15.2 RTC.17 | length 30.1
  Top Layer w0.254: MSP430.20 37.473,21.768 38.868,21.768 v1(38.9,21.8) ; v1(44.5,21.7) 51.107,21.7 52.005,22.598 v1@52.005,22.7 ; R15.2@47.94,18.105 R15.2@48.04,18.205 ; R15.2 48.14,17.355 v1(48.34,17.155) 48.54,16.955 48.54,13.955 ; v1(51.97,22.9) RTC.17
  Bottom Layer w0.254: v1(38.9,21.8) 38.95,21.75 44.45,21.75 v1(44.5,21.7) ; v1(48.34,17.155) 50.855,17.155 51.4,17.7 51.4,20.7 52,21.3 52,22.695 v1@52.005,22.7
NetMSP430_21: "SD Card.7" MSP430.21 R16.2 RTC.19 | length 33.7
  Top Layer w0.254: MSP430.21 38.392,22.245 38.847,22.7 v1(38.9,22.7) ; v1(42.8,22.598) 42.8,21.084 43.384,20.5 45,20.5 45.392,20.892 52.502,20.892 v1(54.51,22.9) RTC.19 ; R16.2 50.99,18.155 v1(52.84,18.155) 52.84,14.11 52.94,14.01 ; 52.94,13.955 53,14.015
  Bottom Layer w0.254: v1(38.9,22.7) 39.3,22.3 42.502,22.3 v1(42.8,22.598) ; v1(52.84,18.155) 52.84,20.995 v1@54.545,22.7
NetMSP430_27: "SD Card.2" MSP430.27 R14.1 | length 23.7
  Top Layer w0.254: MSP430.27 v1(35.75,25.89) ; v1(42.1,25.89) 42.1,20 43,19.1 45.1,19.1 45.995,18.205 R14.1 46.84,17.355 47.44,16.755 47.44,13.955
  Bottom Layer w0.254: v1(35.75,25.89) v1(42.1,25.89)
NetMSP430_31: MSP430.31 R6.2 Sensor.24 | length 24.3
  Top Layer w0.2: R6.2 18.863,27.805 18.863,27.345 19.362,26.846 Sensor.24@19.362,26.156
  Top Layer w0.254: R6.2 v1(18.823,29.577) ; MSP430.31 33.75,29.15 v1(34.1,29.5)
  Bottom Layer w0.254: v1(18.823,29.577) 18.946,29.7 33.9,29.7 v1(34.1,29.5)
NetMSP430_32: MSP430.32 R7.2 Sensor.23 | length 23.6
  Top Layer w0.2: Sensor.23@19.762,26.156 19.762,26.846 20.073,27.157 20.073,27.795 R7.2
  Top Layer w0.254: R7.2 v1(20.023,30.445) ; MSP430.32 v1@33.25,30.445
  Bottom Layer w0.254: v1(20.023,30.445) v1(33.2,30.445)
NetMSP430_40: "SD Card.5" MSP430.40 R13.1 RTC.18 | length 39.2
  Top Layer w0.254: v1(29,22.2) 29.023,22.223 30.528,22.223 MSP430.40 ; v1(43.577,21.123) 45.052,21.123 45.225,21.296 51.871,21.296 v1@53.275,22.7 ; 50.74,14.01 50.89,14.16 R13.1 v1(51.94,16.955) ; v1(53.24,22.9) RTC.18
  Bottom Layer w0.254: v1(29,22.2) 31.2,22.2 32.277,21.123 v1(43.577,21.123) ; v1(51.94,16.955) 51.94,20.666 53.275,22.001 v1@53.275,22.7
NetR17_2: R17.2 U_Det.1 U_Reg.4 | length 9.9
  Top Layer w0.254: R17.2 R17.2@16.777,9.781 ; U_Reg.4@16.777,12.427 16.777,11.927 R17.2@16.777,9.781 ; U_Det.1@21.673,12.427 21.673,10.327 21.127,9.781 R17.2@16.777,9.781
STAT1: 470.2@20.823,7.452 Laderegler.3 | length 20.3
  Top Layer w0.254: 470.2@20.823,7.452 v1(20.823,8.777) ; Laderegler.3 37.223,10.077 v1(37.323,9.977)
  Bottom Layer w0.254: v1(20.823,8.777) 21.642,9.596 29.292,9.596 29.673,9.977 v1(37.323,9.977)
STAT2: 470.2@22.623,7.452 Laderegler.4 | length 20.9
  Top Layer w0.254: 470.2@22.623,7.452 v1(22.623,8.777) ; Laderegler.4 35.446,10.6 37.9,10.6 v1(38.423,10.077)
  Bottom Layer w0.254: v1(22.623,8.777) 23.023,9.177 37.523,9.177 v1(38.423,10.077)
"Taster Pin": C6.2 MSP430.34 R5.1 Taster.1 | length 40.5
  Top Layer w0.254: Taster.1 3.74,30.94 R5.1 v1@7.673,32 ; MSP430.34 v1(32.3,31.2)
  Bottom Layer w0.254: Taster.1 3.92,31.2 v1(32.3,31.2)
  other v1: 7.7,32
TCK: JTAG.7 MSP430.15 | length 61.4
  Top Layer w0.254: v1(13.583,33.4) 13.583,35.397 12.1,36.88 12.1,47.1 14.089,49.089 15.049,49.089 JTAG.7 ; MSP430.15 39.637,19.245 40.192,19.8 40.192,33 v1@39.618,33.574
  Bottom Layer w0.254: v1(13.583,33.4) v1(39.637,33.4)
TDI: JTAG.3 MSP430.13 | length 65.5
  Top Layer w0.254: JTAG.3 10.371,49.029 10.371,48.129 11.2,47.3 11.2,36.7 10.2,35.7 v1(10.2,34.8) ; MSP430.13 40.04,18.245 41,19.205 v1@41,34.8
  Bottom Layer w0.254: v1(10.2,34.8) v1(40.8,34.8)
TDO/TDI: JTAG.1 MSP430.12 | length 70.3
  Top Layer w0.254: JTAG.1 7.673,49.187 8.6,49.187 10.796,46.991 10.796,36.867 v1@9.429,35.5 ; MSP430.12 36.75,17.7 40.3,17.7 41.5,18.9 v1(41.5,35.45)
  Bottom Layer w0.254: v1(9.4,35.5) 9.45,35.45 v1(41.5,35.45)
TEST: JTAG.8 MSP430.22 | length 59.4
  Top Layer w0.254: v1(14.778,32.6) 14.778,34.773 12.504,37.047 12.504,46.929 12.736,47.161 12.736,47.164 13.396,47.825 15.925,47.825 16.4,48.3 16.4,50.62 JTAG.8 ; MSP430.22 37.473,22.768 38.068,22.768 39.7,24.4 39.7,32 v1(39.1,32.6)
  Bottom Layer w0.254: v1(14.778,32.6) v1(39.1,32.6)
TMS: JTAG.5 MSP430.14 | length 61.8
  Top Layer w0.254: JTAG.5 12.502,49.082 12.502,48.129 11.673,47.3 11.673,36.727 12.7,35.7 v1(12.7,34.1) ; MSP430.14 39.801,18.745 40.596,19.54 40.596,33.8 40.296,34.1 v1(40.2,34.1)
  Bottom Layer w0.254: v1(12.7,34.1) v1(40.2,34.1)
"VCC TARGET": JTAG.4 P5.3 | length 12.9
  Bottom Layer w0.254: JTAG.4 10.14,54.94 11.225,56.025 17.775,56.025 18.195,56.445 18.195,57.485 P5.3
"VCC TOOL": JTAG.2 P5.1 | length 9.1
  Bottom Layer w0.254: JTAG.2 7.6,52.425 8.4,53.225 9.376,53.225 9.736,53.585 9.736,55.107 12.079,57.45 13.05,57.45 P5.1
pads on no net: "SD Card.1" "SD Card.8" "SD Card.9" "SD Card.10" "SD Card.11" "SD Card.12" "SD Card.13" "SD Card.14" "SD Card.15" J1.2 J1.3 J1.4 J1.6 J1.7 J1.8 J1.9 J1.10 J1.11 JTAG.6 JTAG.10 JTAG.12 JTAG.13 JTAG.14 Laderegler.10 MSP430.2 MSP430.3 MSP430.5 MSP430.6 MSP430.7 MSP430.8 MSP430.16 MSP430.17 MSP430.19 MSP430.24 MSP430.25 MSP430.26 MSP430.28 MSP430.29 MSP430.30 MSP430.33 MSP430.38 MSP430.39 MSP430.42 MSP430.43 MSP430.45 MSP430.46 MSP430.49 RTC.2 RTC.3 RTC.5 RTC.20 Sensor.1 Sensor.2 Sensor.3 Sensor.4 Sensor.5 Sensor.6 Sensor.7 Sensor.9 Sensor.11 Sensor.12 Sensor.14 Sensor.15 Sensor.16 Sensor.17 Sensor.21 Sensor.22 U_Det.4
copper on no net:
  other v1: 40.55,1.375
  other v2: 4.5,4.5 61.5,4.5 4.5,58.5 61.5,58.5

## Polygon pours and split planes (outlines as drawn)
GND on Top Layer "Top Layer-No Net 3" (solid, shelved, pour order 24): 0,0 66,0 66,15 60,15 60,46 66,46 66,63 0,63
no net on Top Layer "Top Layer-No Net" (solid, shelved, pour order 14): 34.598,10.052
no net on Top Layer "Top Layer-No Net 1" (solid, shelved, pour order 12): 35.773,8.502
no net on Top Layer "Top Layer-No Net 2" (solid, shelved, pour order 10): 35.773,8.327
GND on Bottom Layer "Bottom Layer-No Net" (solid, shelved, pour order 26): 0,0 66,0 66,15 60,15 60,46 66,46 66,63 0,63

## Keep-outs
Keep-Out Layer:
  circle w0.254: c4.5,58.5 r3
  circle w0.254: c61.5,58.5 r3
  circle w0.254: c4.5,4.5 r3
  circle w0.254: c61.5,4.5 r3
  lines w0.254: 0,0 0,63 66,63 66,46 60,46 60,15 66,15 66,0 0,0

## Silkscreen, mask and mechanical layers (free items; w line width, h text height)
Top Overlay:
  circle w0.254: c43.9,47.6 r6
  lines w0.254: 2.52,46.06 27.92,46.06 27.92,55.06 2.52,55.06 2.52,46.06
Mechanical 1:
  the board outline again, w0.254

## Text inside footprints (layer, text, board x,y; h text height)
/PG: Mechanical 15 "+" at 19.895,2.588 h1 r180
"DIP SW": Top Overlay "8" at 5.592,14.636 h1.27 r270; Top Overlay "7" at 3.052,14.636 h1.27 r270; Top Overlay "1" at 3.052,25.812 h1.27 r270; Top Overlay "2" at 5.592,26.32 h1.27 r270
JTAG: Top Overlay "13" at 24.872,48.752 h1.27; Top Overlay "14" at 24.872,51.292 h1.27; Top Overlay "1" at 4.552,48.752 h1.27; Top Overlay "2" at 4.552,51.292 h1.27
STAT1: Mechanical 15 "+" at 24.22,2.594 h1 r180
STAT2: Mechanical 15 "+" at 28.12,2.601 h1 r180